# Altium PCB 季浩原.PcbDoc
Units mil, origin at the board's own origin, x right, y up, seen from the top; angles counter-clockwise.
Board outline 6000 x 4000 mil, 2 copper layers (Top Layer, Bottom Layer); 25 components, 16 nets, 61 pads, 0 vias.
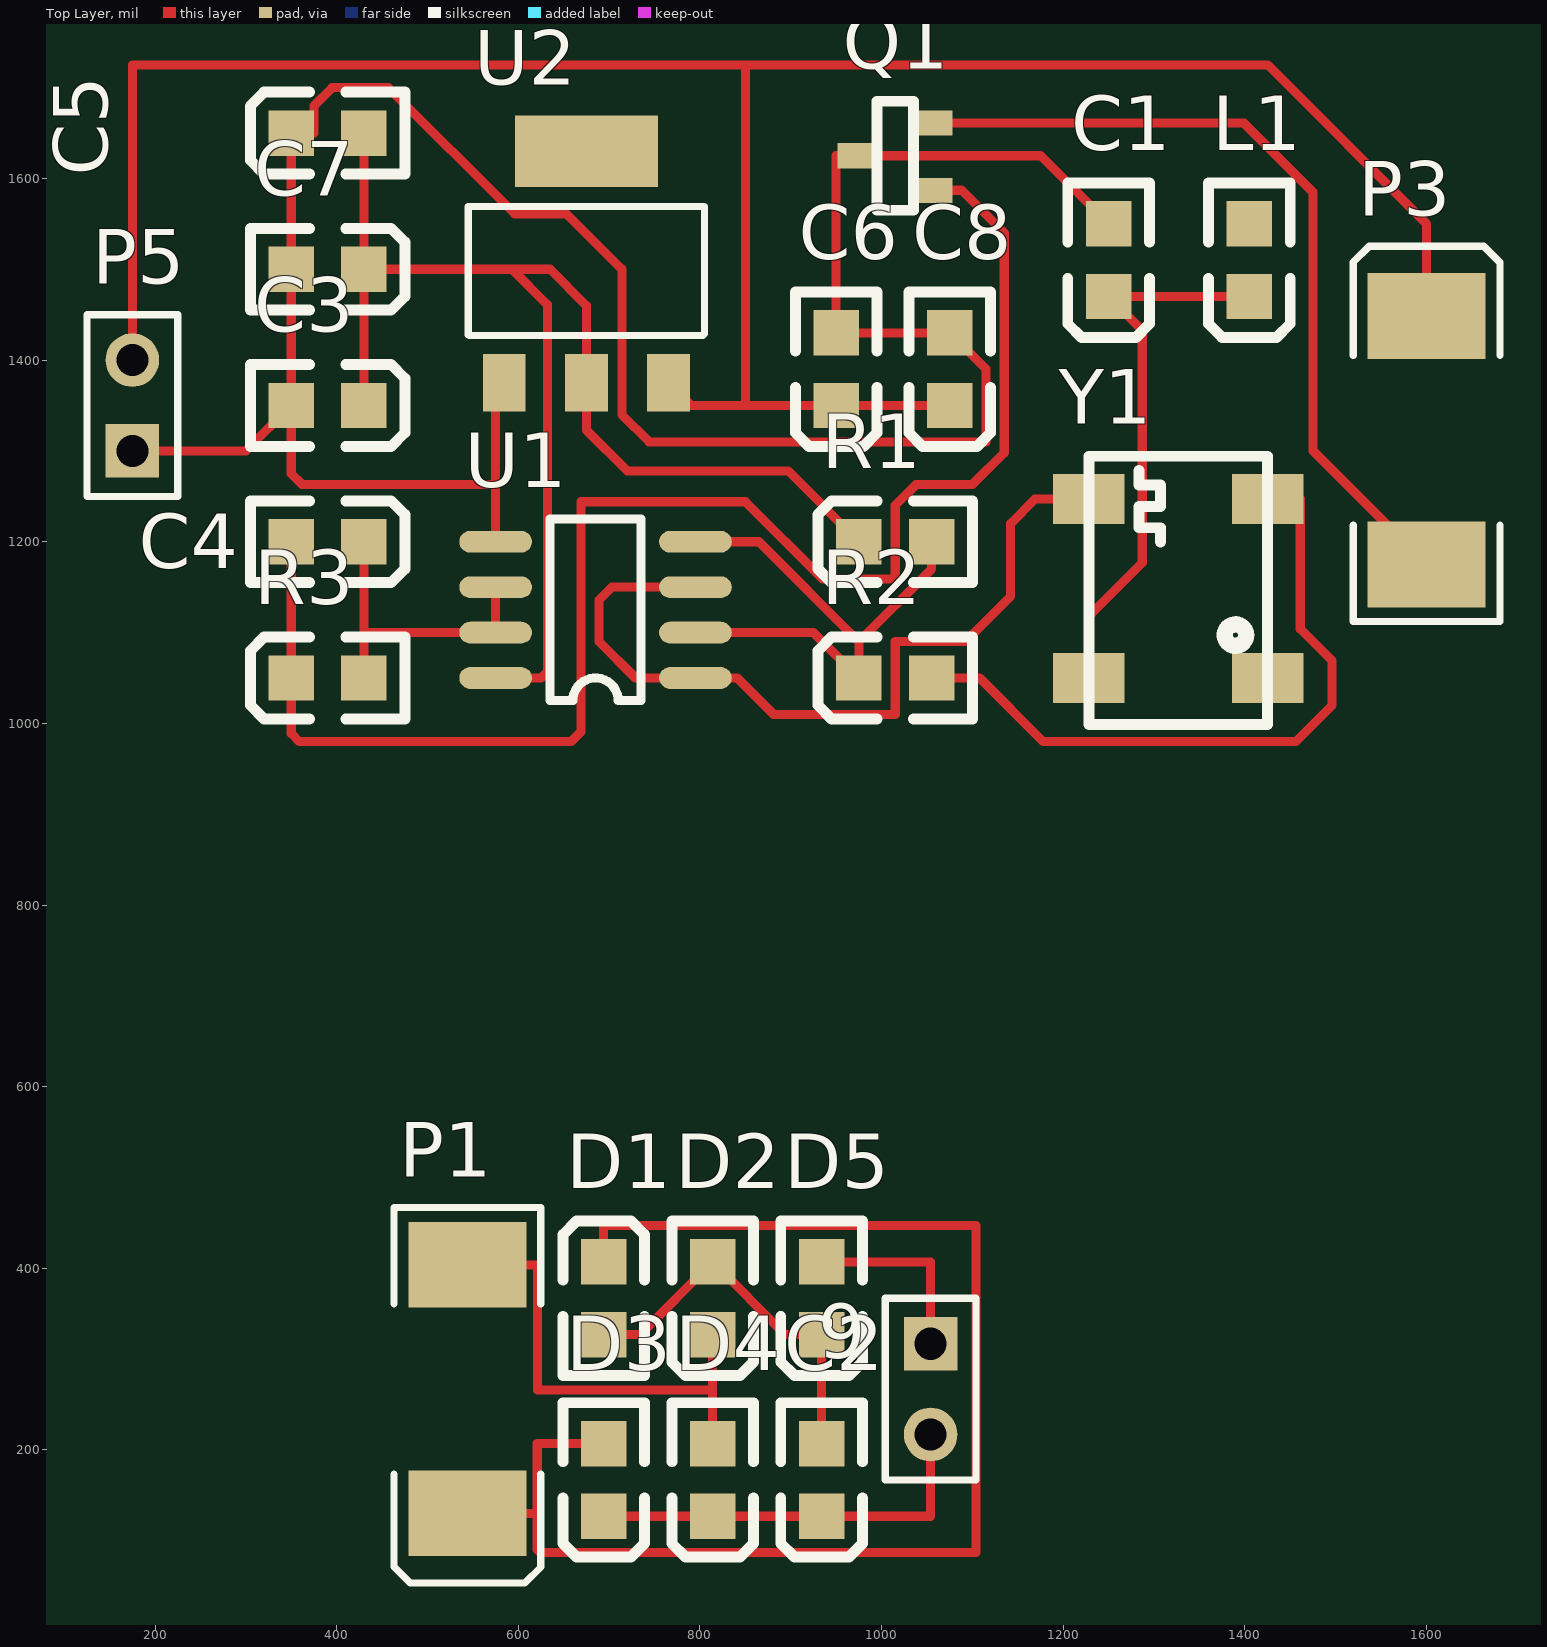
[diagram p0: Top Layer view]
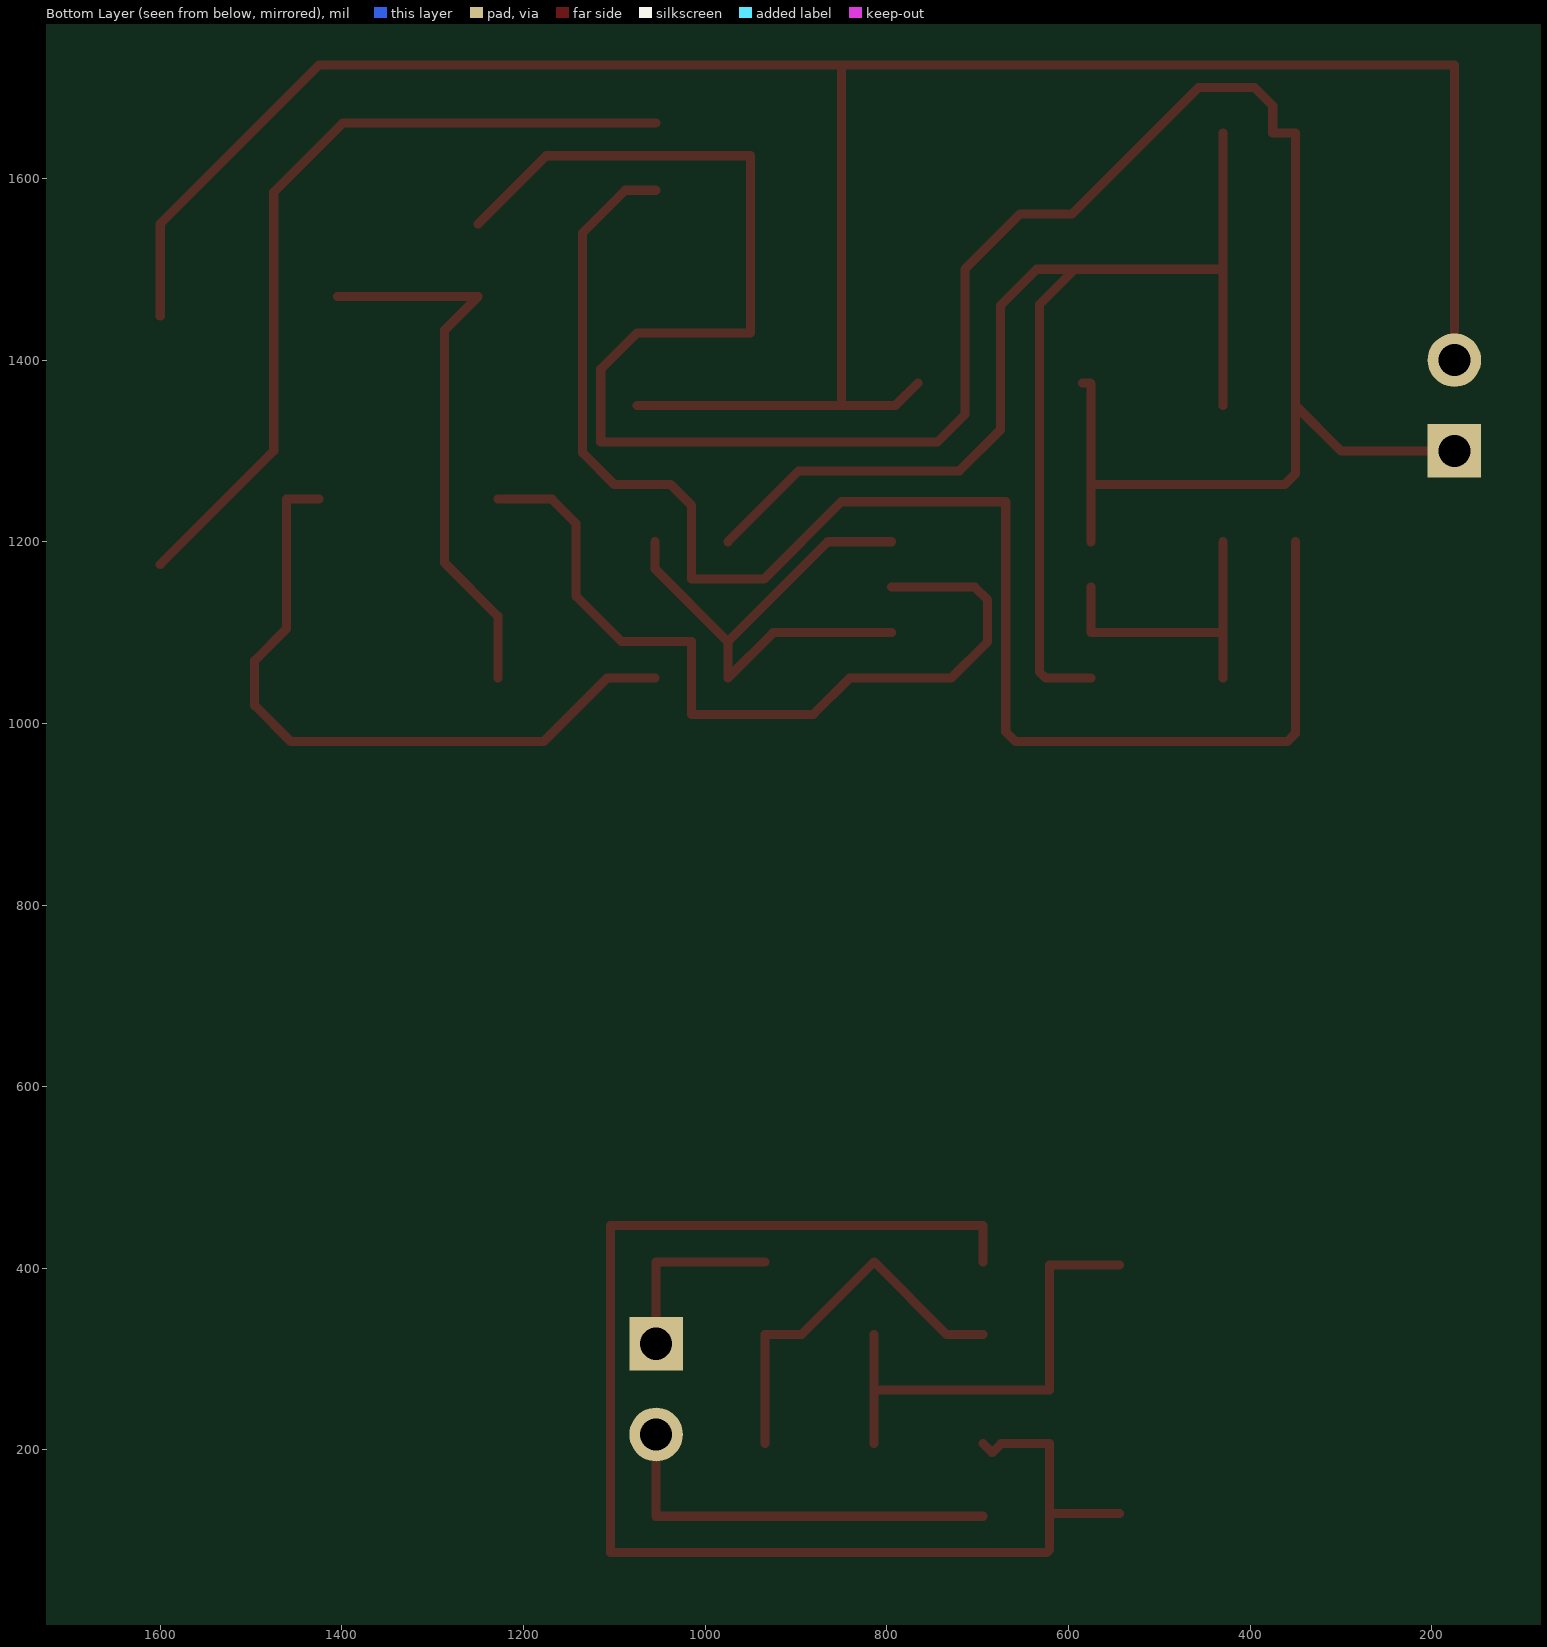
[diagram p1: Bottom Layer view, seen from below]

## Layer stack, top to bottom
Top Layer: signal copper 1.4
Dielectric: dielectric 12.6, FR-4, Dk 4.8
Bottom Layer: signal copper 1.4

## Board outline
-1000,-500 5000,-500 5000,3500 -1000,3500

## Design rules (kind name [scope] priority, off if disabled: settings)
Clearance [All] p1: gap=10
PolygonConnect [All] p1: connectstyle=Relief reliefconductorwidth=10 reliefentries=4 polygonreliefangle="90 Angle"
RoutingVias [All] p1: holewidth=28 width=50 viastyle="Through Hole" minholewidth=28 minwidth=50 maxholewidth=28 maxwidth=50
SilkscreenOverComponentPads SilkToSolderMaskClearance [IsPad] p1: minsilkscreentomaskgap=10
SolderMaskExpansion [All] p1: expansion=4
Width [All] p1: maxlimit=10 minlimit=10 preferedwidth=10
27 further rules are at their usual default settings.

## Components (designator, comment, footprint, x,y, rotation, side; value= is the part's Value field where it differs from the comment)
9 "Header 2" HDR1X2 1054,317 r270 top
C1 "Cap" MELF2 1250,1470 r270 top
C2 "Cap" MELF2 934,127 r270 top
C3 "Cap" MELF2 430,1350 r0 top
C4 "Cap" MELF2 430,1200 r0 top
C5 "Cap Semi" MELF2 350,1650 r180 top
C6 "Cap Pol1" MELF2 950,1350 r270 top
C7 "Cap Pol1" MELF2 430,1500 r0 top
C8 "Cap" MELF2 1075,1350 r270 top
D1 "Diode 1N4001" MELF2 694,407 r90 top
D2 "Diode 1N4001" MELF2 814,327 r270 top
D3 "Diode 1N4001" MELF2 694,127 r270 top
D4 "Diode 1N4001" MELF2 814,127 r270 top
D5 "LED0" MELF2 934,327 r270 top
L1 "Inductor" MELF2 1405,1470 r270 top
P1 "接收端方案1" SMC 544,267 r270 top
P3 "发射端" SMC 1600,1311.81 r90 top
P5 "Header 2" HDR1X2 175,1300 r90 top
Q1 "NPN" SOT-23 1054.37,1661.01 r180 top
R1 "Res Semi" MELF2 975,1200 r180 top
R2 "Res Semi" MELF2 975,1050 r180 top
R3 "Res Semi" MELF2 350,1050 r180 top
U1 "TLV3502" SO-8 795,1050 r180 top
U2 "AMS1117-50" SOT-223 675,1375 r0 top
Y1 "Y?" XTAL6 1425,998.82 r90 top

## Footprints (in the part's own frame and the unit in brackets; to place one, negate y for a bottom-side part, rotate by r counter-clockwise, add the part's x,y. Pads: shape width x height; smd on the part's side, far side on the other; paste and mask are expansions set on the pad)
HDR1X2 [mm] "Connector; Header; 2 Posi"
  rect 1.5x1.5 hole 0.9: 1(0,0)
  round 1.5 hole 0.9: 2(2.54,0)
  silkscreen extent -1.27,-1.27 3.81,1.27
MELF2 [mil]
  rect 50x50 smd: 1(0,0) 2(-80,0)
  silkscreen extent -125,-45 45,45
SMC [mm] "DO-214-AB/SMC; 2 C-Bend Leads; Body 7.9 x 5.9 mm, inc. leads ("
  rect 2.4x3.3 smd: 1(-3.475,0) 2(3.475,0)
  silkscreen extent -5.07,-2.05 5.43,2.05
SO-8 [mil]
  oval 80x24 smd: 1(0,0) 2(0,-50) 3(0,-100) 4(0,-150) 5(220,-150) 6(220,-100) 7(220,-50) 8(220,0)
  silkscreen extent 60,-175 160,25
SOT-23 [mm]
  rect 1.2x0.7 smd: 1(0,0) 2(0,1.88) 3(2.016,0.915)
  silkscreen extent 0.49,-0.61 1.51,2.44
SOT-223 [mm]
  rect 1.2x1.6 smd: 1(-2.3,0) 2(0,0) 3(2.3,0)
  rect 4x2 smd: 4(0,6.477)
  silkscreen extent -3.3,1.32 3.3,4.93
XTAL6 [mm]
  rect 1.4x2 smd: 1(1.3,0) 2(6.3,0) 3(6.3,5) 4(1.3,5)
  silkscreen extent 0,0 7.5,5

## Part data
9 P5: "Header, 2-Pin"
C1 C2 C3 C4 C8: "C"
C5: "Capacitor (Semiconductor SI"
C6 C7: "Polarized Capacitor"
D1 D2 D3 D4: "1 Amp General Purpose R"
D5: "Typical INFRARED"
P1 P3: library part "Header 2", "Header, 2-Pin"
Q1: "NPN Bipolar"
R1 R2 R3: "Semiconductor"

## Nets (pads, with @x,y where several pads share a name; then routed paths per layer and width w, separated by ;. In a path a pad name is that pad's centre, name@x,y a point inside that pad or via, vN(x,y) a via of type N, cw(c..) or ccw(c..) an arc to the next point about the centre after c; other vN are vias at no path point)
5V: C3.1 C5.2 C7.1 R1.1 U1.8 U2.2 | length 1568.6
  Top Layer w10: C3.1 C7.1 ; C5.2 C7.1 ; U1.8 625,1050 632,1057 632,1461 593,1500 ; R1.1 897,1278 720,1278 675,1323 U2.2 675,1460 635,1500 593,1500 ; C7.1 593,1500
12V: C6.1 C8.1 P3.2 P5.2 U2.3 | length 2618.7
  Top Layer w10: P5.2 175,1725 850,1725 ; U2.3 790.55,1350 850,1350 ; C8.1 C6.1 850,1350 ; P3.2 1600,1550 1425,1725 850,1725 ; 850,1350 850,1725
GND: C1.2 C3.2 C5.1 C6.2 C7.2 C8.2 P5.1 Q1.3 U1.5 U2.1 | length 2831.6
  Top Layer w10: P5.1 300,1300 C3.2 ; U1.5 575,1261 ; U2.1 576,1375 575,1374 575,1261 ; C1.2 1175,1625 Q1.3 950,1625 C6.2 C8.2 1115,1390 1115,1310 744,1310 714,1340 714,1500 653,1561 596,1561 457,1700 395,1700 375,1680 375,1650 C5.1 C7.2 C3.2 ; C3.2 350,1275 362,1263 573,1263 575,1261
Net9_1: 9.1 D5.2 | length 210
  Top Layer w10: D5.2 1054,407 9.1
Net9_2: 9.2 C2.1 D3.1 D4.1 | length 450
  Top Layer w10: D3.1 D4.1 C2.1 1054,127 9.2
NetC1_1: C1.1 L1.1 Y1.4 | length 614.7
  Top Layer w10: Y1.4 1228.15,1118.15 1287,1177 1287,1433 C1.1 L1.1
NetC2_2: C2.2 D1.2 D2.2 D5.1 | length 426.3
  Top Layer w10: D1.2 734,327 D2.2 894,327 D5.1 C2.2
NetC4_1: C4.1 R3.2 U1.6 U1.7 | length 345
  Top Layer w10: R3.2 430,1100 ; C4.1 430,1100 ; U1.6 U1.7 430,1100
NetC4_2: C4.2 Q1.2 R3.1 | length 1739.6
  Top Layer w10: C4.2 R3.1 350,989 359,980 658,980 669,991 669,1244 850,1244 935,1159 1015,1159 1015,1240 1038,1263 1100,1263 1135,1298 1135,1540 1088.01,1586.99 Q1.2
NetD1_1: D1.1 D3.2 P1.2 | length 1569.6
  Top Layer w10: P1.2 620.81,130.19 ; D3.2 684,197 674,207 620.81,207 620.81,130.19 ; D1.1 694,447 1104,447 1104,87 624,87 620.81,90.19 620.81,130.19
NetD2_1: D2.1 D4.2 P1.1 | length 527.6
  Top Layer w10: P1.1 621,403.81 621,266.19 814,266.19 ; D4.2 814,266.19 ; D2.1 814,266.19
NetP3_1: P3.1 Q1.1 | length 913.9
  Top Layer w10: Q1.1 1398.99,1661.01 1475,1585 1475,1300 P3.1
NetR1_2: R1.2 R2.1 U1.2 U1.4 | length 609.4
  Top Layer w10: U1.2 925,1100 R2.1 975,1090 ; U1.4 865,1200 975,1090 ; R1.2 1055,1170 975,1090
NetR2_2: R2.2 Y1.2 | length 763.9
  Top Layer w10: R2.2 1108,1050 1178,980 1456,980 1496,1020 1496,1069 1461,1104 1461,1246.85 Y1.2
NetU1_1: U1.1 U1.3 Y1.3 | length 921.9
  Top Layer w10: U1.3 703,1150 689,1136 689,1090 729,1050 U1.1 841,1050 881,1010 1015,1010 1015,1090 1092,1090 1142,1140 1142,1220 1168.85,1246.85 Y1.3
VCC: L1.2
pads on no net: U2.4 Y1.1